# EAGLE board t44_PWM (EAGLE 9.1.0)
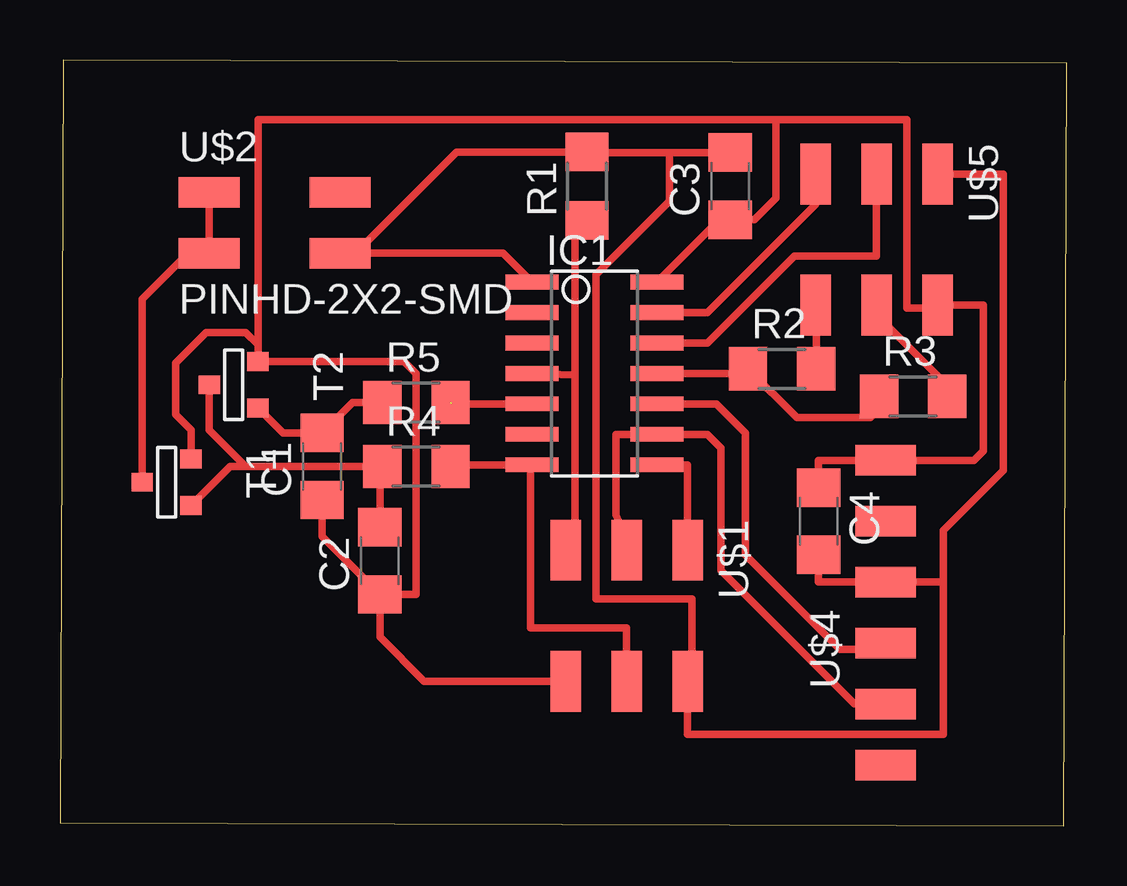
[diagram p0: board, top side]
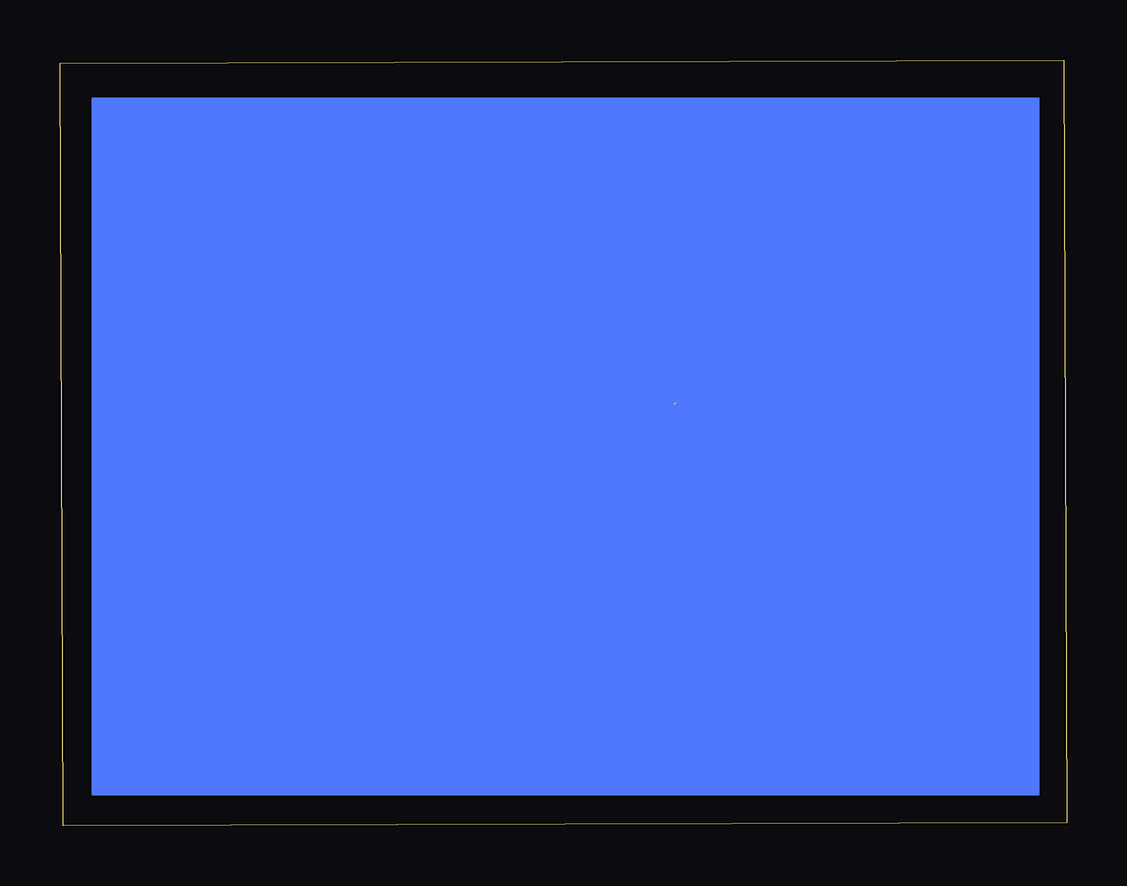
[diagram p1: board, bottom side, seen from below]

Size 41.96 x 31.93 mm. Coordinates in mm from the lower left corner, seen from the top.
Outline: 0,0.13 41.83,0 41.96,31.8 0.13,31.93 0,0.13
Copper layers (1*16): Top 0.035mm / dielectric 1.5mm / Bottom 0.035mm
Design rules "default *": minimum track width 10mil, minimum drill 24mil, track to track 16mil, track to pad 16mil, pad to pad 8mil, via to via 8mil, smd to smd 16mil, copper to edge 40mil, drill to drill 8mil, minimum pad ring 10mil, minimum via ring 8mil, stop-mask expansion 4mil, vias tented up to drill 0mil, thermal gap 10mil

## Footprints (pad centres in the part's own frame; a part is rotated, then mirrored left to right if it is on the bottom)
C1206 = smd 1.6 x 1.8: 1 -1.4,0; 2 1.4,0
SOIC14 = smd 0.61 x 2.21: 1 -3.81,-2.603; 2 -2.54,-2.603; 3 -1.27,-2.603; 4 0,-2.603; 5 1.27,-2.603; 6 2.54,-2.603; 7 3.81,-2.603; 8 3.81,2.603; 9 2.54,2.603; 10 1.27,2.603; 11 0,2.603; 12 -1.27,2.603; 13 -2.54,2.603; 14 -3.81,2.603
R1206 = smd 1.6 x 1.803: 1 -1.422,0; 2 1.422,0
SOT-23 = smd 0.787 x 0.889: 1 0.025,-1.016; 2 -0.94,1.016; 3 0.991,1.016
2X03SMD = smd 2.54 x 1.27: 1 -2.54,2.54; 2 2.92,2.54; 3 -2.54,0; 4 2.92,0; 5 -2.54,-2.54; 6 2.92,-2.54
2X02SMD = smd 2.54 x 1.27: 1 -2.54,1.27; 2 2.92,1.27; 3 -2.54,-1.27; 4 2.92,-1.27
1X06SMD = smd 2.54 x 1.27: 1 0,6.35; 2 0,3.81; 3 0,1.27; 4 0,-1.27; 5 0,-3.81; 6 0,-6.35

## Placement (x,y rotation side)
C1  [C1206]  10.92,14.99 90 top
C2  [C1206]  13.34,11.05 90 top
C3  [C1206]  27.94,26.67 90 top
C4  [C1206]  31.62,12.7 270 top
IC1  ATTINY44-SSU  [SOIC14]  22.29,18.86 270 top
R1  [R1206]  21.97,26.67 90 top
R2  [R1206]  30.1,19.05 0 top
R3  [R1206]  35.56,17.91 0 top
R4  [R1206]  14.86,14.99 0 top
R5  [R1206]  14.86,17.65 0 top
T1  [SOT-23]  4.45,14.35 270 top
T2  [SOT-23]  7.24,18.41 270 top
U$1  AVRISPSMD  [2X03SMD]  23.62,8.95 270 top
U$2  PINHD-2X2-SMD  [2X02SMD]  8.76,25.15 0 top
U$4  FTDI-SMD-HEADER  [1X06SMD]  34.42,8.89 0 top
U$5  AVRISPSMD  [2X03SMD]  34.04,24.64 270 top

## Library data of the parts
C1-C4 T1 T2 U$4 U$5 = fab
IC1 R1-R5 U$1 U$2 = fabcopy

## Nets
GND: C1.1 C2.1 C3.1 C4.1 IC1.14 T1.2 T2.2 U$1.6 U$4.1 U$5.2
N$1: C2.2 R4.1 T1.3 T2.1
N$2: R2.2 U$5.6
N$3: IC1.8 U$1.1
N$5: IC1.4 R1.1 U$1.5
N$6: C1.2 R5.1 T2.3
N$7: R3.2 U$5.4
N$8: T1.1 U$2.1 U$2.3
N$11: IC1.13 U$5.5
N$12: IC1.12 U$5.3
N$13: IC1.11 R2.1 R3.1
PWMFAST: IC1.5 R5.2
PWMSLOW: IC1.7 R4.2 U$1.4
RX: IC1.10 U$4.4
TX: IC1.9 U$1.3 U$4.5
VCC: C3.2 C4.2 IC1.1 R1.2 U$1.2 U$2.4 U$4.3 U$5.1

## Tracks (layer width: path | path; a pad name or v marks a point on that pad's centre or on a via)
GND
  Top 0.305: T1.2 5.46,16.51 4.83,17.14 4.83,19.3 6.1,20.57 7.75,20.57 8.26,20.07 T2.2 | C2.1 13.34,7.87 15.18,6.03 17.02,6.03 U$1.6 21.03,5.98 | C2.1 10.92,12.06 C1.1 | C2.1 14.85,9.65 14.85,18.86 14.34,19.37 8.27,19.37 T2.2 | IC1.14 27.49,25.27 C3.1 28.95,25.27 29.84,26.16 29.84,29.45 30.86,29.45 | C4.1 31.62,15.24 U$4.1 38.1,15.24 38.48,15.62 38.48,16.38 38.48,21.72 U$5.2 36.83,21.72 36.83,21.59 35.31,21.59 35.31,23.75 35.31,29.45 30.86,29.45 | 30.86,29.45 8.26,29.45 T2.2
N$1
  Top 0.305: C2.2 13.34,14.88 R4.1 7.75,14.99 | 7.75,14.99 7.09,14.99 T1.3 | T2.1 6.22,16.51 7.75,14.99
N$2
  Top 0.305: R2.2 31.52,21.31 31.5,21.34 U$5.6
N$3
  Top 0.305: IC1.8 26.04,15.05 26.16,15.04 U$1.1
N$5
  Top 0.305: IC1.4 21.46,18.8 | 21.46,11.56 21.46,18.8 | 21.46,18.8 21.46,24.74 R1.1
  Top 0.406: U$1.5 21.46,11.56
N$6
  Top 0.305: T2.3 9.29,16.39 C1.2 12.19,17.65 R5.1
N$7
  Top 0.305: R3.2 36.98,18.36 34.04,21.31 U$5.4
N$8
  Top 0.305: T1.1 3.43,21.97 5.33,23.88 U$2.3 U$2.1
N$11
  Top 0.305: IC1.13 26.99,21.4 31.5,25.91 U$5.5
N$12
  Top 0.305: 33.94,27.18 U$5.3 34.04,23.75 30.61,23.75 26.99,20.13 IC1.12
N$13
  Top 0.305: IC1.11 28.49,18.86 R2.1 30.71,17.02 33.78,17.02 34.67,17.91 R3.1
PWMFAST  (1 unrouted)
  Top 0.305: IC1.5 16.34,17.59
PWMSLOW
  Top 0.305: 19.62,15.05 19.62,8.26 23.62,8.26 U$1.4 | IC1.7 16.34,15.05 R4.2
  Top 0.406: IC1.7 19.62,15.05
RX
  Top 0.305: IC1.10 27.37,17.59 28.57,16.38 28.57,11.3 32.51,7.37 34.16,7.37 U$4.4
TX
  Top 0.305: 23.88,11.3 23.18,12.95 23.18,16.32 IC1.9 26.99,16.32 27.56,15.75 27.56,10.64 33.12,5.08 U$4.5
  Top 0.406: 23.88,11.3 U$1.3
VCC
  Top 0.305: 26.35,6.92 26.35,9.46 22.35,9.46 22.35,22.99 25.4,26.04 25.4,28.07 25.02,28.07 | 25.02,28.07 22,28.07 R1.2 16.54,28.09 12.32,23.88 U$2.4 18.48,23.88 IC1.1 | 36.83,10.16 34.67,10.16 U$4.3 31.62,10.16 C4.2 | 36.83,10.16 36.83,3.81 26.16,3.81 U$1.2 | C3.2 25.02,28.07 | U$5.1 39.24,27.18 39.32,27.18 39.32,25.78 39.32,14.81 36.83,12.32 36.83,10.16
  Top 0.406: IC1.1 18.8,22.61 | 26.35,6.92 26.29,6.92 U$1.2
(copper drawn outside any net)
  shapes: Bottom area x1